# Altium PCB DCS_MCU.PcbDoc
Units mil, origin at the board's own origin, x right, y up, seen from the top; angles counter-clockwise.
Board outline 3937.01 x 2362.2 mil, 2 copper layers (Top Layer, Bottom Layer), stack 63.8 mil thick; 55 components, 40 nets, 185 pads, 3 vias.
Unrouted connection lines stored in the file: 1.
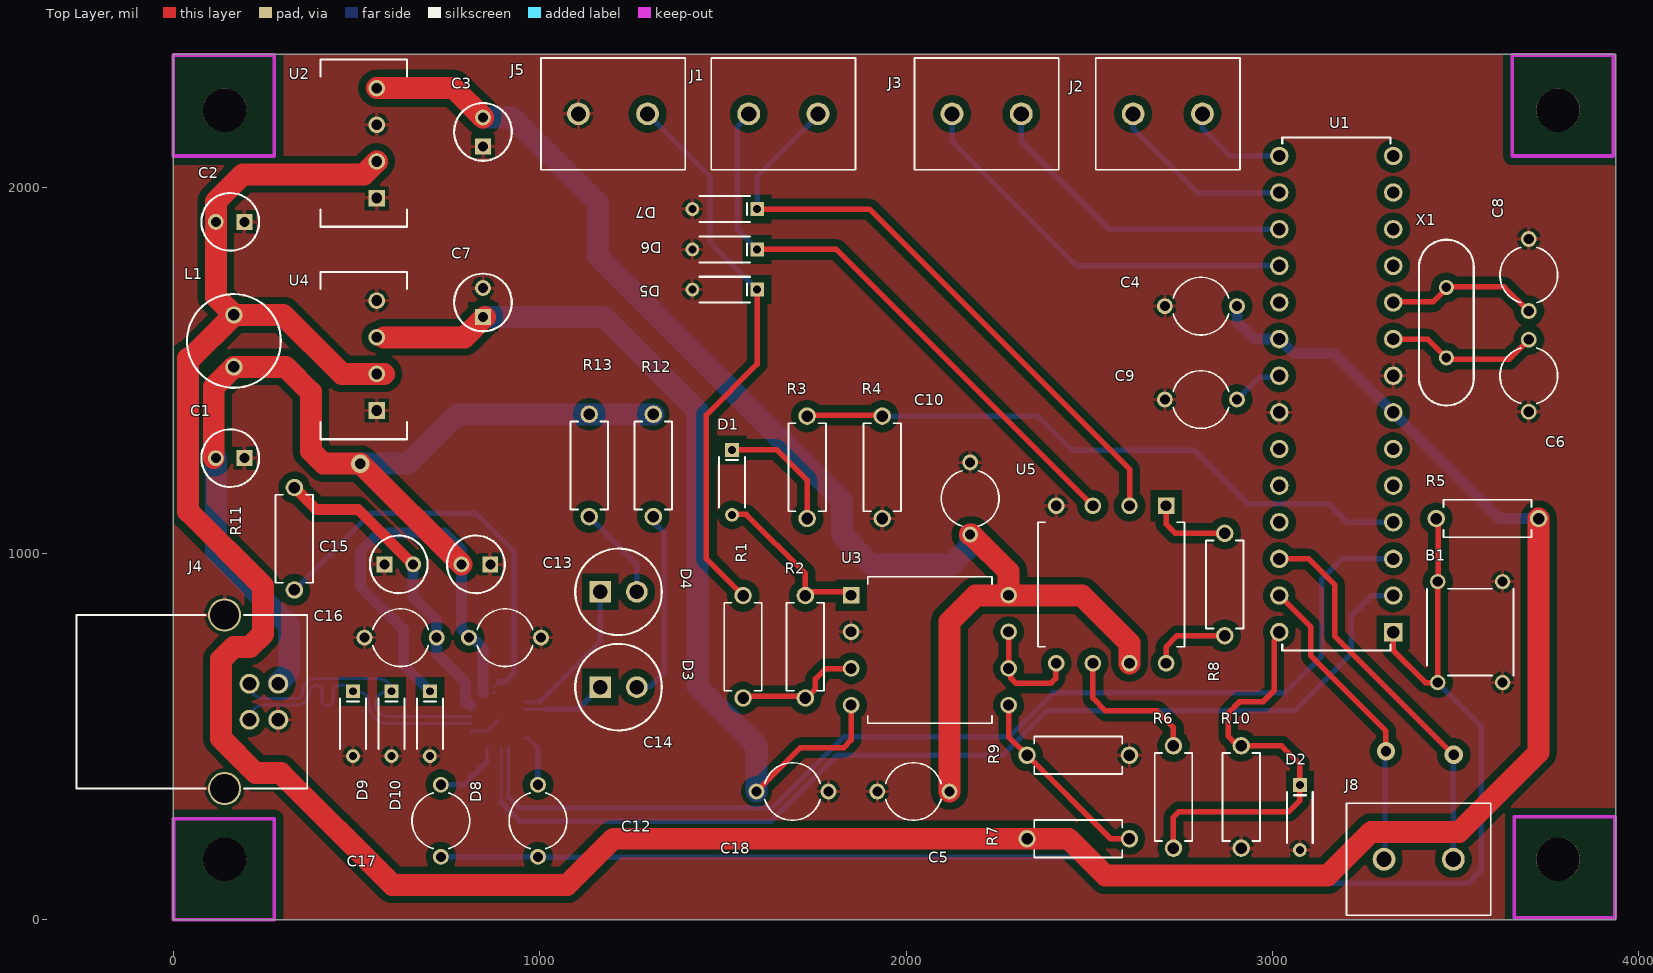
[diagram p0: Top Layer view]
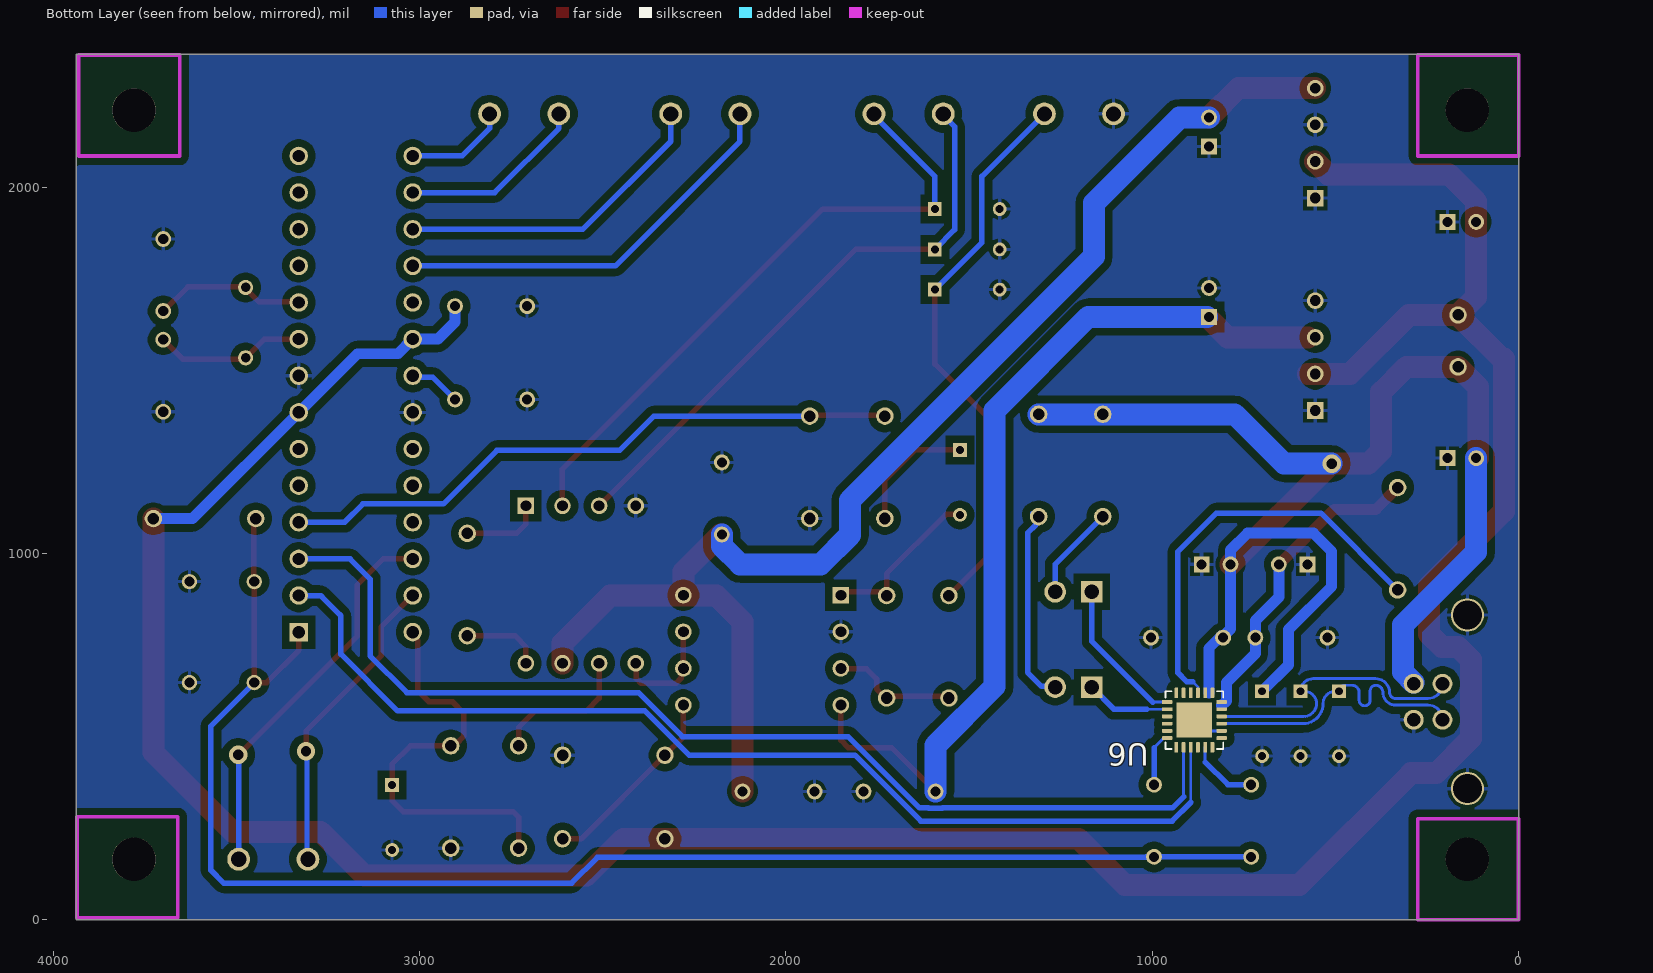
[diagram p1: Bottom Layer view, seen from below]
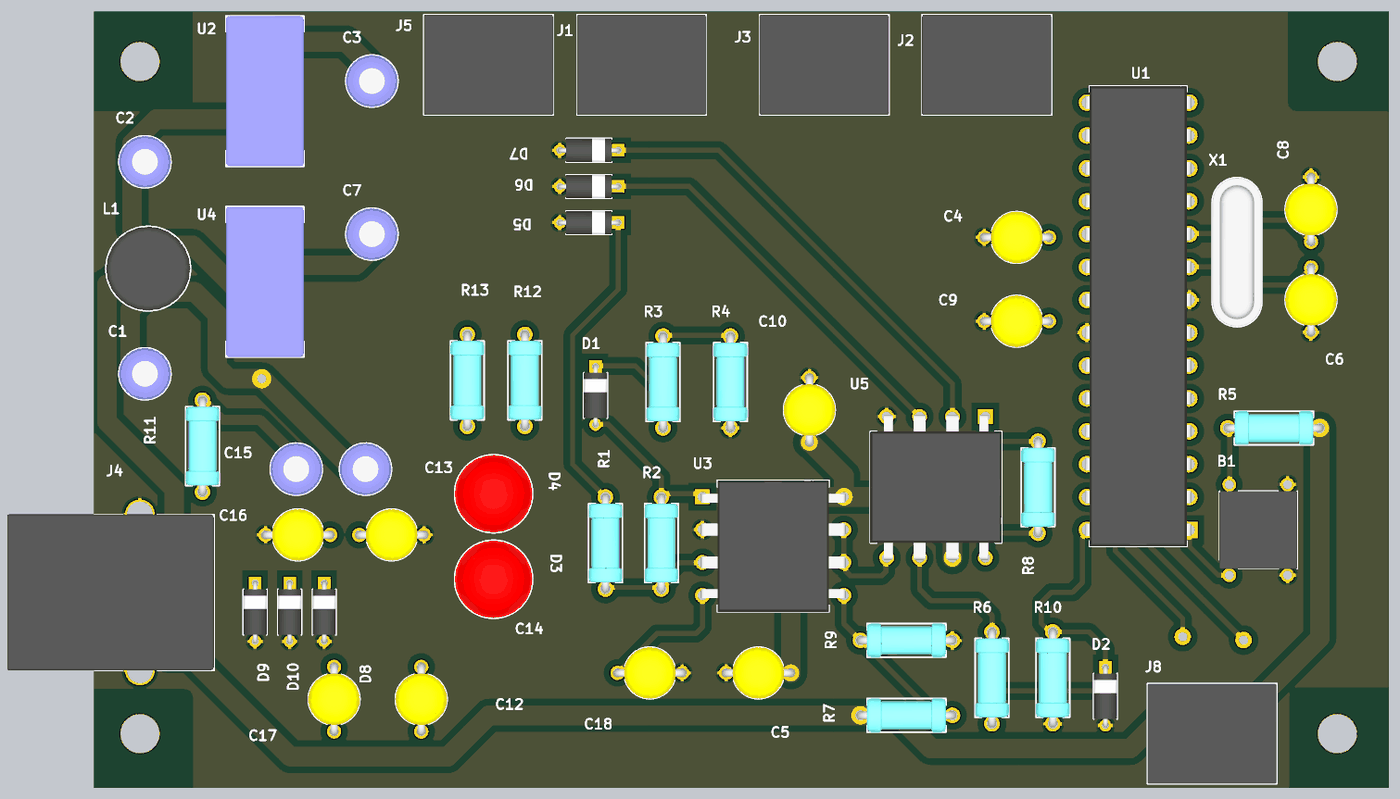
[diagram p2: 3D render of the assembled board from above, using the file's embedded part models]

## Layer stack, top to bottom
Top Solder: solder mask 0.4, Solder Resist, Dk 3.5
Top Layer: signal copper 1.4
Dielectric 1: dielectric 61, FR-4, Dk 4.8
Bottom Layer: signal copper 1.4
Bottom Solder: solder mask 0.4, Solder Resist, Dk 3.5

## Board outline
0,0 0,2362.2 3937.01,2362.2 3937.01,0

## Design rules (kind name [scope] priority, off if disabled: settings)
Clearance [All] p1: gap=20 ignorepadtopadclearanceinfootprint=FALSE except(0: Arc-Hole Track-Hole SMDPad-Hole THPad-Hole Via-Hole Fill-Hole Poly-Hole Region-Hole Text-Hole; 8: Arc-Arc Arc-Track Arc-SMDPad Arc-THPad Arc-Via Arc-Text Track-Track Track-SMDPad Track-THPad Track-Via Track-Text; 9: SMDPad-SMDPad; 10: SMDPad-THPad SMDPad-Via SMDPad-Text THPad-THPad THPad-Via THPad-Text Via-Via Via-Text Text-Text)
DiffPairsRouting [All] p1: maxlimit=10 minlimit=10 mostfreqgap=10 toplayer_minwidth=7 toplayer_maxwidth=15 toplayer_prefwidth=15 bottomlayer_minwidth=7 bottomlayer_maxwidth=15 bottomlayer_prefwidth=15 maxuncoupledlength=500
HoleSize [All] p1: absolutevalues=TRUE maxlimit=196.85 minlimit=15.75 maxpercent=80.000 minpercent=20.000
MinimumSolderMaskSliver [All] p1 off: minsoldermaskwidth=10
PolygonConnect [All] p1: connectstyle=Relief reliefconductorwidth=10 reliefentries=4 polygonreliefangle="90 Angle" airgapwidth=10
RoutingVias [All] p1: holewidth=28 width=50 viastyle="Through Hole" minholewidth=15.75 minwidth=50 maxholewidth=28 maxwidth=50
SilkToSolderMaskClearance [IsPad] p1 off: minsilkscreentomaskgap=10 clearancetoexposedcopper=TRUE
SolderMaskExpansion [All] p1: expansion=4 istentingtop=FALSE
Width [All] p1: maxlimit=80 minlimit=7 preferedwidth=10
26 further rules are at their usual default settings.

## Classes and differential pairs
differential pair USB_D: +USB_D_P -USB_D_N

## Components (designator, comment, footprint, x,y, rotation, side; value= is the part's Value field where it differs from the comment)
B1 "Button_SPST" Button_small 3540,785 r0 top
C1 "Capacitor_NP" CAPPRD200W50D400H800 155,1260 r180 top value=4.7uF
C2 "Capacitor_NP" CAPPRD200W50D400H800 155,1905 r180 top value=4.7uF
C3 "Capacitor_NP" CAPPRD200W50D400H800 845,2150.63 r90 top value=2.2uF
C4 "Capacitor_NP" CAPRD500W50D400H600 2805,1675 r0 top value=100nF
C5 "Capacitor_NP" CAPRD500W50D400H600 2020,350 r0 top value=100nF
C6 "Capacitor_NP" CAPRD500W50D400H600 3700,1485 r270 top value=15pF
C7 "Capacitor_NP" CAPPRD200W50D400H800 845,1685 r90 top value=2.2uF
C8 "Capacitor_NP" CAPRD500W50D400H600 3700,1760 r90 top value=15pF
C9 "Capacitor_NP" CAPRD500W50D400H600 2805,1420 r0 top value=100nF
C10 "Capacitor_NP" CAPRD500W50D400H600 2175,1150 r270 top value=100nF
C12 "Capacitor_NP" CAPRD500W50D400H600 995,270 r90 top value=100nF
C13 "Capacitor_NP" CAPPRD200W50D400H800 825.63,970 r180 top value=4.7uF
C14 "Capacitor_NP" CAPRD500W50D400H600 905,770 r180 top value=100nF
C15 "Capacitor_NP" CAPPRD200W50D400H800 615,970 r0 top value=4.7uF
C16 "Capacitor_NP" CAPRD500W50D400H600 620,770 r0 top value=100nF
C17 "Capacitor_NP" CAPRD500W50D400H600 730,270 r90 top value=100nF
C18 "Capacitor_NP" CAPRD500W50D400H600 1690,350 r180 top value=100nF
D1 "Diode" DIOAD450W35L350D200 1525,1193.9 r270 top
D2 "Diode_Zener" DIOAD450W35L350D200 3075,278.9 r270 top
D3 "Diode_LED" LEDRD254W60D600H1000 1215,635 r0 top
D4 "Diode_LED" LEDRD254W60D600H1000 1215,895 r0 top
D5 "Diode_TVS" DIOAD450W35L350D200 1505,1720 r180 top
D6 "Diode_TVS" DIOAD450W35L350D200 1505,1830 r180 top
D7 "Diode_TVS" DIOAD450W35L350D200 1505,1940 r180 top
D8 "Diode_TVS" DIOAD450W35L350D200 700,535 r270 top
D9 "Diode_TVS" DIOAD450W35L350D200 490,535 r270 top
D10 "Diode_TVS" DIOAD450W35L350D200 595,535 r270 top
J1 "Terminal_2-pole" Terminal_2-pole 1665,2200 r180 top
J2 "Terminal_2-pole" Terminal_2-pole 2714.49,2200 r180 top
J3 "Terminal_2-pole" Terminal_2-pole 2220,2200 r0 top
J4 "USB_B_F" USB_B_F 50,595 r0 top
J5 "Terminal_2-pole" Terminal_2-pole 1200,2200 r180 top
J8 "Terminal_2-pole" Terminal_2-pole 3399.49,165 r0 top
L1 "Inductor" INDRD360W60D650H1000 165,1580 r90 top value=6.8uH
R1 "Resistor" RESAD710W60L610D260 1555,745 r270 top value="75 Ohm"
R2 "Resistor" RESAD710W60L610D260 1725,745 r90 top value=18k
R3 "Resistor" RESAD710W60L610D260 1730,1235 r270 top value=10k
R4 "Resistor" RESAD710W60L610D260 1935,1235 r90 top value=6.5k
R5 "Resistor" RESAD710W60L610D260 3587.11,1095 r180 top value=10k
R6 "Resistor" RESAD710W60L610D260 2730,335 r90 top value=1k
R7 "Resistor" RESAD710W60L610D260 2470,220.96 r180 top value=10k
R8 "Resistor" RESAD710W60L610D260 2870,915 r90 top value=1k
R9 "Resistor" RESAD710W60L610D260 2470,449.04 r180 top value=10k
R10 "Resistor" RESAD710W60L610D260 2915,335 r90 top value=1k
R11 "Resistor" RESAD710W60L610D260 330,1040 r270 top value=1k
R12 "Resistor" RESAD710W60L610D260 1310,1240 r90 top value=1k
R13 "Resistor" RESAD710W60L610D260 1135,1240 r90 top value=1k
U1 "ATMEGA328P-PU" DIP790W46P254L3556H508Q28 3174.49,1435 r90 top
U2 "IEB0105S12" SIP600W50P254L1160H1016Q4 519.57,2120 r90 top
U3 "RC4558P" DIP1092W45P254L1016H508Q8 2065,735.94 r270 top
U4 "IEB0105S12" SIP600W50P254L1160H1016Q4 519.57,1540 r90 top
U5 "INA121" DIP1092W45P254L1016H508Q8 2560,915 r180 top
U6 "CP2102" QFN25P50_400X400X80L40X24T245N 885,545 r90 bottom
X1 "Oscillator" XTAL_HC49P488T45L1150W380H350 3475,1630 r270 top

## Footprints (in the part's own frame and the unit in brackets; to place one, negate y for a bottom-side part, rotate by r counter-clockwise, add the part's x,y. Pads: shape width x height; smd on the part's side, far side on the other; paste and mask are expansions set on the pad)
Button_small [mm]
  round 1.06 hole 0.7 paste-1.06: 1(-2.25,-3.5) 1(-2.25,3.5) 2(2.25,-3.5) 2(2.25,3.5)
  silkscreen extent -3,-3 3,3, body extent -3,-3 3,3, height 4
CAPPRD200W50D400H800 [mm] "Capacitor, Polarized, Radial (Electrolytic); 2.00 mm Pitch X 4.00 mm Dia X 8.00 mm H body"
  rect 1.1x1.1 / inner round 1.1 / far side rect 1.1x1.1 hole 0.7 paste-1.1: 1(-1,0)
  round 1.1 hole 0.7 paste-1.1: 2(1,0)
  silkscreen extent -2,-2 2,2, body extent -2,-2 2.01,2, height 8.01
CAPRD500W50D400H600 [mm] "Capacitor, Radial (Dipped, Round); 5.00 mm Pitch X 4.00 mm Dia X 6.00 mm H body"
  round 1.1 hole 0.7 paste-1.1: 1(-2.5,0) 2(2.5,0)
  silkscreen extent -1.92,-2 1.92,2, body extent -2.8,-2 2.8,2, height 6
DIOAD450W35L350D200 [mm] "Diode, Axial; 4.50 mm Pitch X 0.35 mm W 3.50 mm L X 2.00 mm Dia. body"
  round 0.96 hole 0.55 paste-0.96: A(2.25,0)
  rect 0.96x0.96 / inner round 0.96 / far side rect 0.96x0.96 hole 0.55 paste-0.96: C(-2.25,0)
  silkscreen extent -1.75,-0.9 1.75,0.9, body extent -2.42,-0.91 2.42,0.91, height 2.01
DIP790W46P254L3556H508Q28 [mm] "DIP, 7.90 mm lead span, 2.54 mm pitch; 28 pin, 35.56 mm L X 7.50 mm W X 5.08 mm H body"
  rect 1.28x1.28 / inner round 1.28 / far side rect 1.28x1.28 hole 0.85 paste-1.28: 1(-16.51,-3.95)
  round 1.28 hole 0.85 paste-1.28: 2(-13.97,-3.95) 3(-11.43,-3.95) 4(-8.89,-3.95) 5(-6.35,-3.95) 6(-3.81,-3.95) 7(-1.27,-3.95) 8(1.27,-3.95) 9(3.81,-3.95) 10(6.35,-3.95) 11(8.89,-3.95) 12(11.43,-3.95) 13(13.97,-3.95) 14(16.51,-3.95) 15(16.51,3.95) 16(13.97,3.95) 17(11.43,3.95) 18(8.89,3.95) 19(6.35,3.95) 20(3.81,3.95) 21(1.27,3.95) 22(-1.27,3.95) 23(-3.81,3.95) 24(-6.35,3.95) 25(-8.89,3.95) 26(-11.43,3.95) 27(-13.97,3.95) 28(-16.51,3.95)
  silkscreen extent -17.78,-3.75 17.78,3.75, body extent -17.78,-4.1 17.78,4.1, height 5.08
DIP1092W45P254L1016H508Q8 [mm] "DIP, 10.92 mm lead span, 2.54 mm pitch; 8 pin, 10.16 mm L X 8.62 mm W X 5.08 mm H body"
  rect 1.15x1.15 / inner round 1.15 / far side rect 1.15x1.15 hole 0.75 paste-1.15: 1(-3.81,-5.46)
  round 1.15 hole 0.75 paste-1.15: 2(-1.27,-5.46) 3(1.27,-5.46) 4(3.81,-5.46) 5(3.81,5.46) 6(1.27,5.46) 7(-1.27,5.46) 8(-3.81,5.46)
  silkscreen extent -5.08,-4.31 5.08,4.31, body extent -5.08,-5.59 5.08,5.59, height 5.08
INDRD360W60D650H1000 [mm] "Inductor, Radial; 3.60 mm Pitch X 6.50 mm Dia X 10.00 mm H body"
  round 1.21 hole 0.8 paste-1.21: 1(-1.8,0) 2(1.8,0)
  silkscreen extent -3.25,-3.25 3.25,3.25, body extent -3.25,-3.25 3.25,3.25, height 10
LEDRD254W60D600H1000 [mm] "Radial (LED), 2.54 mm Pitch X 6.00 mm Dia X 10.00 mm H body"
  round 1.5 hole 1 paste-1.5: A(1.27,0)
  rect 1.5x1.5 / inner round 1.5 / far side rect 1.5x1.5 hole 1 paste-1.5: C(-1.27,0)
  silkscreen extent -3,-3 3,3, body extent -3,-3 3,3, height 10
QFN25P50_400X400X80L40X24T245N [mm] "Quad Flat No-Lead (QFN) with Thermal Tab, 0.50 mm pitch;  square, 6 pin X 6 pin, 4.00 mm L X 4.00 mm W X 0.80 mm H body"
  rrect50% 0.264x0.737 smd: 1(-1.25,-1.887) 2(-0.75,-1.887) 3(-0.25,-1.887) 4(0.25,-1.887) 5(0.75,-1.887) 6(1.25,-1.887) 13(1.25,1.887) 14(0.75,1.887) 15(0.25,1.887) 16(-0.25,1.887) 17(-0.75,1.887) 18(-1.25,1.887)
  rect 2.45x2.45 smd paste-2.45: 2(0,0)
  rrect50% 0.737x0.264 smd: 7(1.887,-1.25) 8(1.887,-0.75) 9(1.887,-0.25) 10(1.887,0.25) 11(1.887,0.75) 12(1.887,1.25) 19(-1.887,1.25) 20(-1.887,0.75) 21(-1.887,0.25) 22(-1.887,-0.25) 23(-1.887,-0.75) 24(-1.887,-1.25)
  silkscreen extent -2,-2 2,2, body extent -2.05,-2.05 2.05,2.05, height 0.8
RESAD710W60L610D260 [mm] "Resistor, Axial; 7.10 mm Pitch X 0.60 mm W 6.10 mm L X 2.60 mm Dia. body"
  round 1.21 hole 0.8 paste-1.21: 1(-3.55,0) 2(3.55,0)
  silkscreen extent -3.05,-1.3 3.05,1.3, body extent -3.85,-1.3 3.85,1.3, height 2.6
SIP600W50P254L1160H1016Q4 [mm] "SIP, 2.54 mm pitch; 4 pin, 11.60 mm L X 6.00 mm W X 10.16 mm H body"
  rect 1.15x1.15 / inner round 1.15 / far side rect 1.15x1.15 hole 0.75 paste-1.15: 1(-3.81,-0.9)
  round 1.15 hole 0.75 paste-1.15: 2(-1.27,-0.9) 3(1.27,-0.9) 4(3.81,-0.9)
  silkscreen extent -5.8,-3 5.8,3, body extent -5.8,-3 5.8,3, height 10.16
Terminal_2-pole [mm] "Connector, Terminal; 2 pin, 10.00 mm L X 7.75 mm W X 10.00 mm H body"
  round 1.58 hole 1.05 paste-1.58: 1(-2.4,0) 2(2.4,0)
  silkscreen extent -5,-3.88 5,3.88, body extent -5,-3.88 5,3.88, height 10
USB_B_F [mm]
  round 1.38 hole 0.95 paste-1.38: 1(4,1.25) 2(6,1.25) 3(4,-1.25) 4(6,-1.25)
  round 2.3 hole 2 paste-2.3: 5(2.28,-6.02) 5(2.28,6.02)
  silkscreen extent -8,-6.02 8,6.02, body extent -8,-6.02 8,6.02, height 10.9
XTAL_HC49P488T45L1150W380H350 [mm] "Crystal, HC-49; 4.88 mm Pitch X 0.457 mm W, 11.50 mm L X 3.80 mm T X 3.50 mm H body"
  round 1.05 hole 0.65 paste-1.05: 1(-2.44,0) 2(2.44,0)
  silkscreen extent -5.75,-1.9 5.75,1.9, body extent -5.75,-1.9 5.75,1.9, height 3.5

## Part data
B1: library part Button_SPST_NO
C1 C2 C3 C7 C13 C15: library part Capacitor_P, Voltage=50V
C4 C6 C8 C9: Voltage=10V
C5 C10 C12 C14 C16 C17 C18: Voltage=25V
D1: library part Diode_Rectifier
D2: Voltage=3.3V
D3 D4: Color=Green
D5: Voltage=11V
D6 D7 D8 D9 D10: Voltage=6V

## Free pads (board coordinates)
  round 118.11 hole 118.11: 2(140,2210) 3(140,165) 4(3780,165) 5(3780,2210)

## Via types
v1: diameter 50, hole 28, Top Layer to Bottom Layer, 3 vias

## Nets (pads, with @x,y where several pads share a name; then routed paths per layer and width w, separated by ;. In a path a pad name is that pad's centre, name@x,y a point inside that pad or via, vN(x,y) a via of type N, cw(c..) or ccw(c..) an arc to the next point about the centre after c; other vN are vias at no path point)
+5V: C2.2 C4.2 L1.2 R5.1 R7.2 U1.7 U1.20 U2.2 U4.2 | length 8392.8
  Top Layer w60: 40,1532.31 40,1115 244.22,910.78 244.22,780.15 209.07,745 165.15,745 130,709.85 130,495 225,400 292.93,400 597.93,95 1075,95 1200.96,220.96 2444.04,220.96 2545,120 3150,120 3270,240 3510,240 3726.87,456.87 R5.1 ; 41.21,1527.08 L1.2 ; U2.2 520,2035 190,2035 115.63,1960.63 115.63,1700.24 L1.2 ; U4.2@575,1490 U4.2 460,1490 299.13,1650.87 L1.2
  Bottom Layer w30: C4.2 2903.43,1631.57 2950,1585 U1.20 3058.98,1545 3170,1545 U1.7 3620,1095 R5.1 R5.1@3734.76,1095
+12V: C3.2 C5.2 C10.2 U2.4 U3.8 U5.7 | length 3656.8
  Top Layer w60: U2.4 765,2270 C3.2 ; C5.2 2118.43,813.43 2190,885 U3.8@2279.96,885 ; C10.2 2178.35,1051.57 2279.96,949.96 U3.8@2279.96,885 ; U5.7 2610,755 2480,885 U3.8@2279.96,885
  Bottom Layer w60: C3.2 925,2190 1158.92,1956.08 1158.92,1811.08 1825,1145 1825,1050 1905,970 2125,970 2175,1020 C10.2
-12V: C7.1 C18.2 U3.4 U4.3 | length 2502.3
  Top Layer w15: C18.2 1711.57,470 1830.08,470 1850.04,489.96 U3.4@1850.04,585
  Top Layer w60: U4.3@575,1590 794.37,1590 C7.1@850,1645.63
  Bottom Layer w60: C7.1@850,1645.63 1174.37,1645.63 1430,1390 1430,637.12 1591.57,475.54 C18.2
A_I_0: J8.1 U1.27 | length 842.6
  Top Layer w15: U1.27 3105,798.98 3105,720 3310,515 v1(3310,460)
  Bottom Layer w15: J8.1 3307.5,167.5 3307.5,457.5 v1(3310,460)
A_I_1: J8.2 U1.26 | length 1065.1
  Top Layer w15: U1.26 3100,985 3170,915 3170,775 v1(3495,450)
  Bottom Layer w15: J8.2 3494.49,165.51 3494.49,449.49 v1(3495,450)
D_IO_0: J3.1 U1.18 | length 1109.3
  Bottom Layer w15: J3.1 2125.51,2125 2465.51,1785 U1.18
D_IO_1: J3.2 U1.17 | length 878.9
  Bottom Layer w15: J3.2 2314.49,2125 2554.49,1885 U1.17
D_IO_PWM_0: J2.1 U1.15 | length 281.1
  Bottom Layer w15: J2.1 2808.98,2160 2883.98,2085 U1.15
D_IO_PWM_1: J2.2 U1.16 | length 511.5
  Bottom Layer w15: J2.2 2620,2160 2795,1985 U1.16
Force_IN+: D7.C J1.1 U5.2 | length 1734.3
  Top Layer w15: D7.C 1900,1940 2610,1230 U5.2
  Bottom Layer w15: D7.C 1593.58,2029.09 J1.1@1759.49,2195
Force_IN-: D6.C J1.2 U5.3 | length 1607.1
  Top Layer w15: J1.2@1569.56,2195 J1.2@1570.51,2195 ; D6.C 1809.96,1830 U5.3
  Bottom Layer w15: J1.2@1569.56,2195 1539.56,2165 1539.56,1884.03 D6.C
Force_OUT: D2.C R6.1 R10.2 U1.28 | length 1155.3
  Top Layer w15: R6.1 2730,280 2745,295 3045,295 3075,325 D2.C 3075,425 3025.24,474.76 2906.17,474.76 2893.3,487.63 2892.37,487.63 2879.76,500.24 2879.76,564.76 2910,595 2975,595 3005,625 3005,761.45 3018.98,775.42 U1.28
GND: B1.2 C1.1 C2.1 C3.1 C4.1 C5.1 C6.2 C7.2 C8.2 C9.1 C10.1 C13.1 C14.1 C15.1 C16.1 C18.1 D2.A D5.A D6.A D7.A D8.A D9.A D10.A J4.4 J4.5 J5.2 R4.1 R9.1 R10.1 U1.8 U1.22 U2.1 U2.3 U3.2 U4.1 U4.4 U5.4 U6.2 | length 86.5
  Bottom Layer w8: U6.2@810.71,515.47 855.47,515.47 U6.2@885,545
NetC6_1: C6.1 U1.9 X1.2 | length 403.3
  Top Layer w15: U1.9 3423.94,1585 X1.2 ; X1.2@3485,1530 3646.57,1530 C6.1
NetC8_1: C8.1 U1.10 X1.1 | length 415.7
  Top Layer w15: U1.10 3331.42,1686.42 3438.55,1686.42 3475,1722.87 X1.1 3476.42,1727.48 3633,1727.48 C8.1@3698.91,1661.57
NetC9_2: C9.2 U1.21 | length 142.5
  Bottom Layer w15: C9.2 2963.62,1480.19 3014.17,1480.19 U1.21
NetC12_2: C12.2 U6.18 | length 142.6
  Bottom Layer w8: U6.18 968.6,495.79 995,469.39
  Bottom Layer w15: C12.2@995,373.43 995,469.39
NetC17_2: C17.2 U6.23 | length 191.4
  Bottom Layer w8: 855.47,430.47 U6.23
  Bottom Layer w15: C17.2 793.43,368.43 855.47,430.47
NetD1_A: D1.A R2.2 U3.1 | length 446.2
  Top Layer w15: D1.A@1525,1106.42 1563.58,1106.42 1725,945 1725,894.76 1840.28,894.76 U3.1@1850.04,885
NetD1_C: D1.C R3.2 | length 339.4
  Top Layer w15: D1.C@1525,1283.58 1646.42,1283.58 1730,1200 R3.2@1730,1100.24
NetD3_A: D3.A R12.1 | length 540.5
  Bottom Layer w8: R12.1@1330,1100.24 R12.1@1330,1111.49
  Bottom Layer w15: D3.A 1266.84,636.84 1301.84,636.84 1340,675 1340,1055.73 1317.58,1078.15 1317.58,1092.65 R12.1
NetD4_A: D4.A R13.1 | length 259.1
  Bottom Layer w15: R13.1 1265,970.24 D4.A
NetR1_2: R1.2 R2.1 U3.3 | length 341
  Top Layer w15: R1.2 1560,610.24 R2.1@1720,610.24 ; R2.1 1727.35,605.24 1752.46,630.34 1752.46,657.46 1780,685 U3.3@1850.04,685
NetR6_2: R6.2 U5.6 | length 398.4
  Top Layer w15: U5.6 2510,605 2545,570 2685,570 2730,525 R6.2
NetR7_1: R7.1 R9.2 U3.5 | length 530.8
  Top Layer w15: U3.5@2279.96,585 2279.96,499.32 R9.2 2558.32,220.96 R7.1
NetR8_1: R8.1 U5.8 | length 217.5
  Top Layer w15: U5.8 2710,745 2740.24,775.24 R8.1
NetR8_2: R8.2 U5.1 | length 220.4
  Top Layer w15: U5.1 2710,1080 2735.24,1054.76 R8.2
NetR11_2: R11.2 U6.9 | length 1134
  Bottom Layer w8: 875,635 890,650 ; U6.9 U6.9@876.35,620.49
  Bottom Layer w15: R11.2 539.76,1110 824.69,1110 930,1004.69 930,674.13 905.87,650 890,650
NetU3_6: U3.6 U3.7 U5.5 | length 305.5
  Top Layer w15: U3.7 U3.6 2285.75,680.15 2285.75,659.25 2300,645 2395,645 2408.1,658.1 2408.1,698.14 U5.5
RST: B1.1 C12.1 C17.1 R5.2 U1.1 | length 4104.3
  Top Layer w15: U1.1 3330,735 3417.8,647.2 3451.42,647.2 3451.42,922.8 3453.33,924.7 3453.33,1093.09 R5.2@3455.24,1095
  Bottom Layer w15: C17.1@730.42,171.16 C12.1@995,171.16 ; C12.1@995,176.57 1000.42,171.16 1016.78,171.16 1017.94,170 2515,170 2585,100 3535,100 3570,135 3570,528.62 B1.1@3451.42,647.2
RX: U1.3 U6.20 | length 2968.4
  Bottom Layer w8: 914.53,335.47 U6.20
  Bottom Layer w15: 914.53,335.47 945,305 1572.23,305 1572.73,304.5 1610.42,304.5 1610.92,305 1635,305 1830,500 2282.47,500 2402.47,620 3035,620 3135,720 3135,930 3190,985 U1.3
RXT: D4.C U6.13 | length 409.4
  Bottom Layer w8: U6.13 999.21,594.21
  Bottom Layer w15: 999.21,594.21 1165,760 D4.C
Speed_IN: D5.C J5.1 R1.1 | length 1537.9
  Top Layer w15: R1.1 1455,984.76 1455,1377.83 1593.58,1516.42 D5.C
  Bottom Layer w15: J5.1 1465,2029.49 1465,1848.58 D5.C
Speed_OUT: R3.1 R4.2 U1.4 | length 1722.1
  Top Layer w15: R3.1@1730,1379.76 1732.5,1377.26 1932.5,1377.26 R4.2
  Bottom Layer w15: R4.2 2360.31,1374.76 2454.16,1280.92 2789.08,1280.92 2935.01,1134.99 3154.99,1134.99 3204.99,1085 U1.4
TX: U1.2 U6.21 | length 2922.9
  Bottom Layer w8: 894.84,320.16 U6.21
  Bottom Layer w15: 894.84,320.16 946,269 1631.53,269 1812.03,449.5 2264.5,449.5 2385,570 3060,570 3215,725 3215,826.73 cw(c3223,826.69) 3217.31,832.31 3267.67,882.67 cw(c3273.31,877) 3273.31,885 U1.2
TXT: D3.C U6.14 | length 230.8
  Bottom Layer w8: U6.14 1014.53,574.53
  Bottom Layer w15: 1014.53,574.53 1104.53,574.53 D3.C
USB_D_N: D10.C J4.1 U6.4 | length 802.9
  Bottom Layer w8: J4.1 ccw(c247.69,644.21) 247.69,604 336,604 ccw(c336,620) 352,620 cw(c390,620) 390,658 560.58,658 cw(c560.58,623.58) D10.C 585.08,623.58 ccw(c585.08,590) 551.5,590 ccw(c586.66,590) 586.66,554.84 U6.4
USB_D_P: D9.C J4.3 U6.3 | length 801
  Bottom Layer w8: J4.3 cw(c247.69,545.79) 247.69,586 336,586 ccw(c336,620) 362.57,598.79 ccw(c336,620) 370,620 cw(c390,620) 390,640 cw(c390,625) 405,625 405,598.95 ccw(c420,598.95) 435,598.95 435,620 cw(c455,620) 435.15,622.45 cw(c455,620) 455,640 473.58,640 cw(c473.58,623.58) D9.C 499.92,623.58 cw(c499.92,590) 533.5,590 ccw(c588.34,590) 588.34,535.16 U6.3
VBUS: C1.2 C13.2 C14.2 D8.C J4.2 L1.1 R12.2 R13.2 U6.7 U6.8 | length 3965.6
  Top Layer w60: C1.2@110,1260 110,1454.13 L1.1 305.87,1509.13 375,1440 375,1280.15 410.15,1245 v1(510,1245) 511.26,1245 C13.2
  Bottom Layer w30: D8.C 628.34,695.25 628.34,791.66 510,910 510,1005 560,1055 740,1055 786.26,1008.74 C13.2 786.26,793.92 806.57,773.6 C14.2 ; C14.2@811.57,775 845.63,740.94 845.63,619.29
  Bottom Layer w60: C1.2 115.63,1004.37 315,805 315,675.62 J4.2@287.12,647.74 ; v1(510,1245) 640,1245 774.76,1379.76 R13.2 R12.2
VDD: C15.2 C16.2 R11.1 U6.5 U6.6 | length 861.6
  Top Layer w30: R11.1 389.76,1120 504.37,1120 C15.2
  Bottom Layer w30: C15.2 654.37,880.63 718.43,816.57 C16.2 718.43,726.57 797.5,647.5 797.5,597.58 810.71,584.37
pads on no net: U1.5 U1.6 U1.11 U1.12 U1.13 U1.14 U1.19 U1.23 U1.24 U1.25 U6.1 U6.10 U6.11 U6.12 U6.15 U6.16 U6.17 U6.19 U6.22 U6.24

## Polygon pours and split planes (outlines as drawn)
GND on Top Layer "NONET_L-01_P-001" (solid, pour order 1): 0,2085 275,2085 275,2360 3655,2360 3655,2085 3935,2085 3935,280 3660,280 3660,0 275,0 275,275 0,275
GND on Bottom Layer "NONET_L-01_P-001" (solid, pour order 2): 0,2085 275,2085 275,2360 3655,2360 3655,2085 3935,2085 3935,280 3660,280 3660,0 275,0 275,275 0,275

## Keep-outs
Keep-Out Layer:
  lines w10: -0.59,2085 275,2085 275,2360.59 -0.59,2360.59 -0.59,2085 ; 0,0 275.59,0 275.59,275.59 0,275.59 0,0 ; 3655,2085 3930.59,2085 3930.59,2360.59 3655,2360.59 3655,2085 ; 3660,5 3935.59,5 3935.59,280.59 3660,280.59 3660,5

## Silkscreen, mask and mechanical layers (free items; w line width, h text height)
Mechanical 1:
  the board outline again, w10